# Altium PCB controlTP2.PcbDoc
Units mm, origin at the board's own origin, x right, y up, seen from the top; angles counter-clockwise.
Board outline 50 x 50.04 mm, 2 copper layers (Top Layer, Bottom Layer); 25 components, 18 nets, 69 pads, 0 vias.
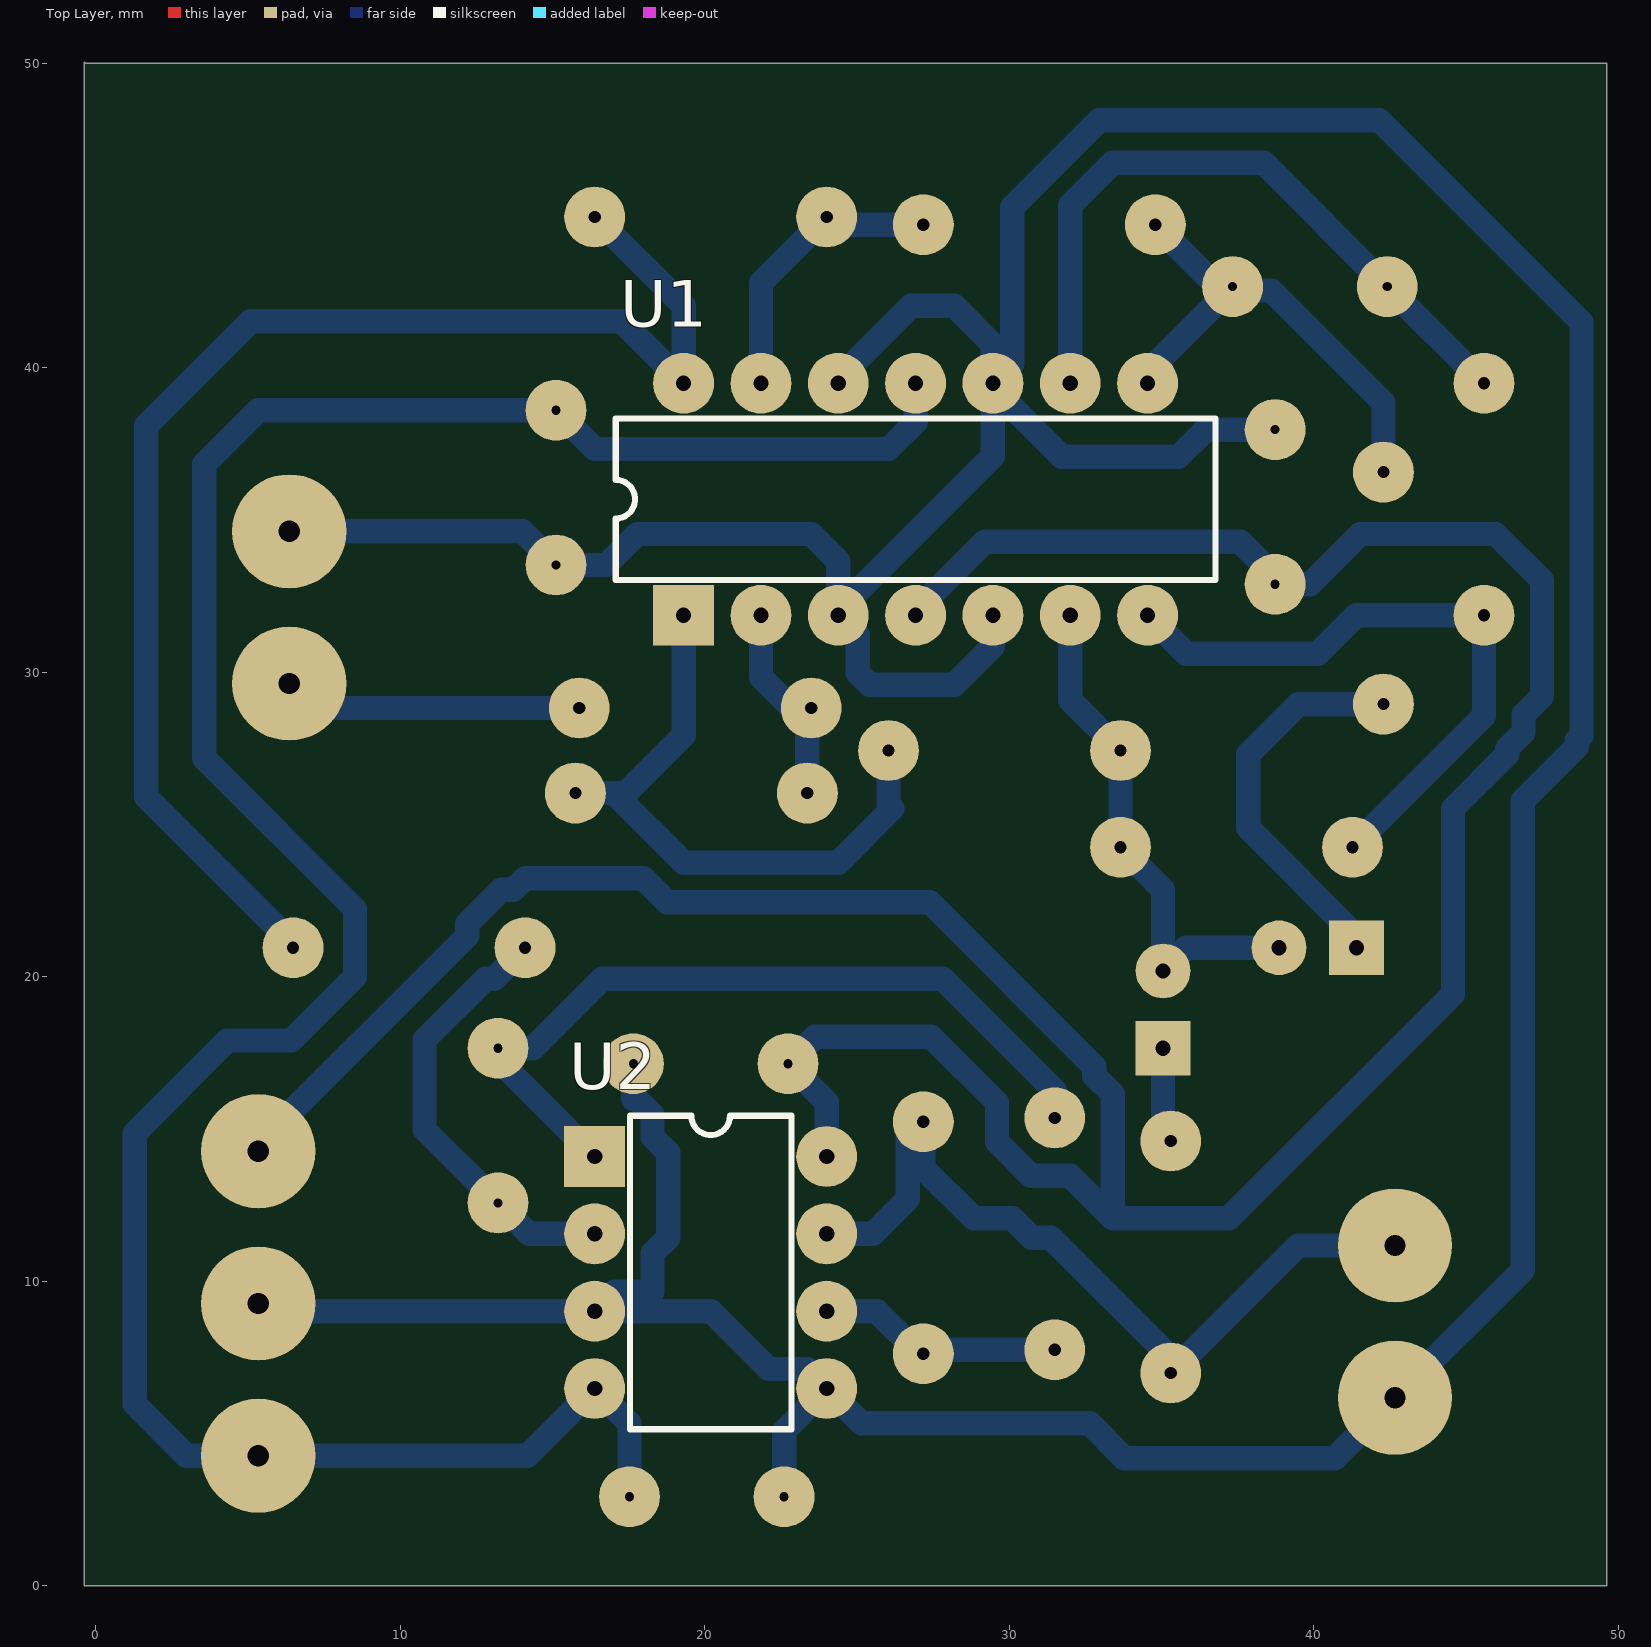
[diagram p0: Top Layer view]
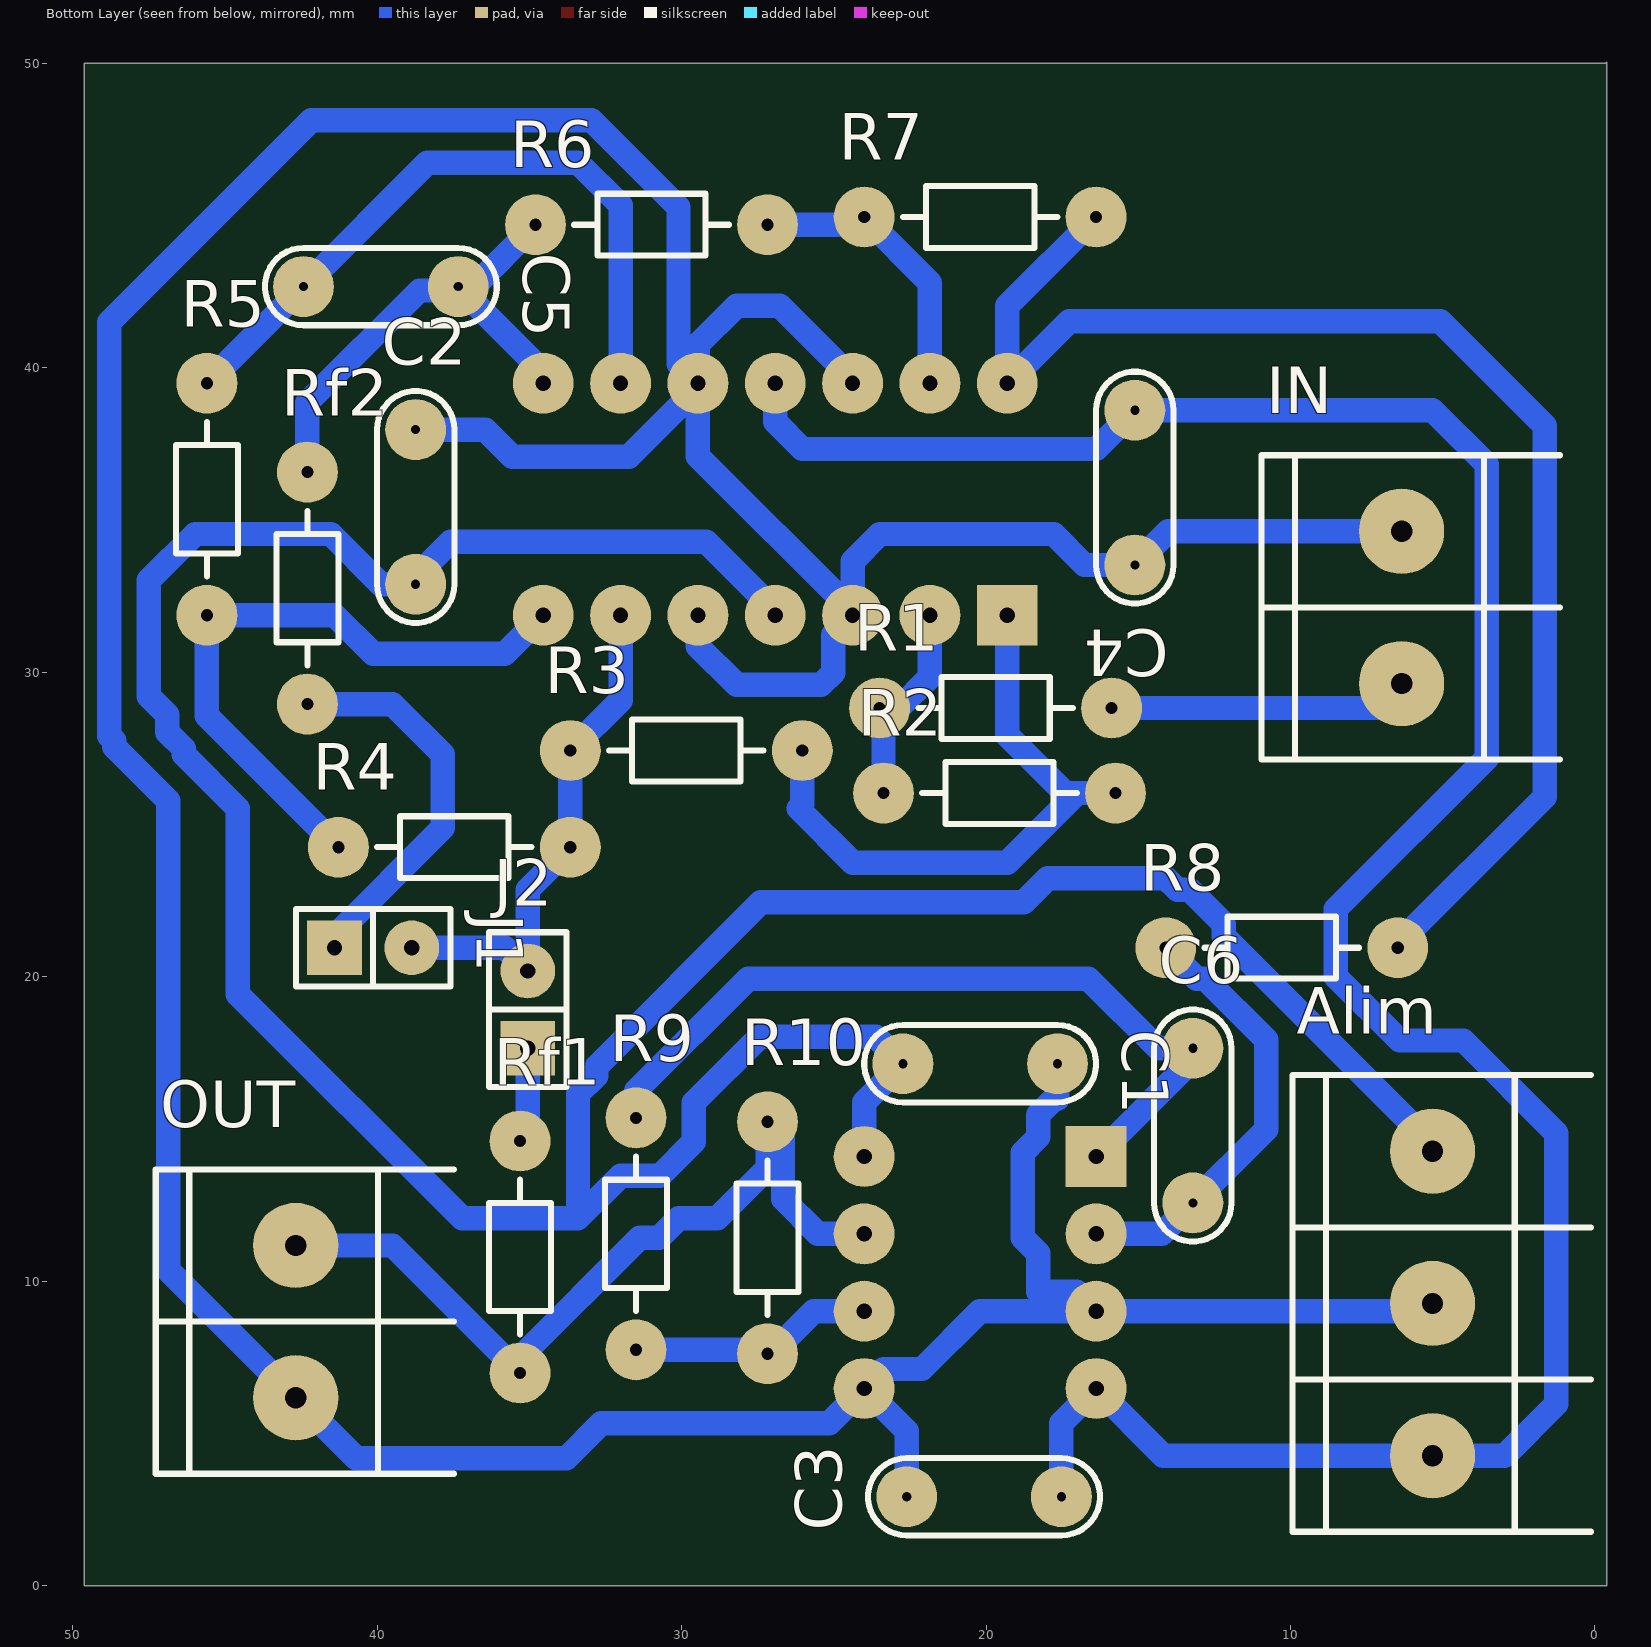
[diagram p1: Bottom Layer view, seen from below]
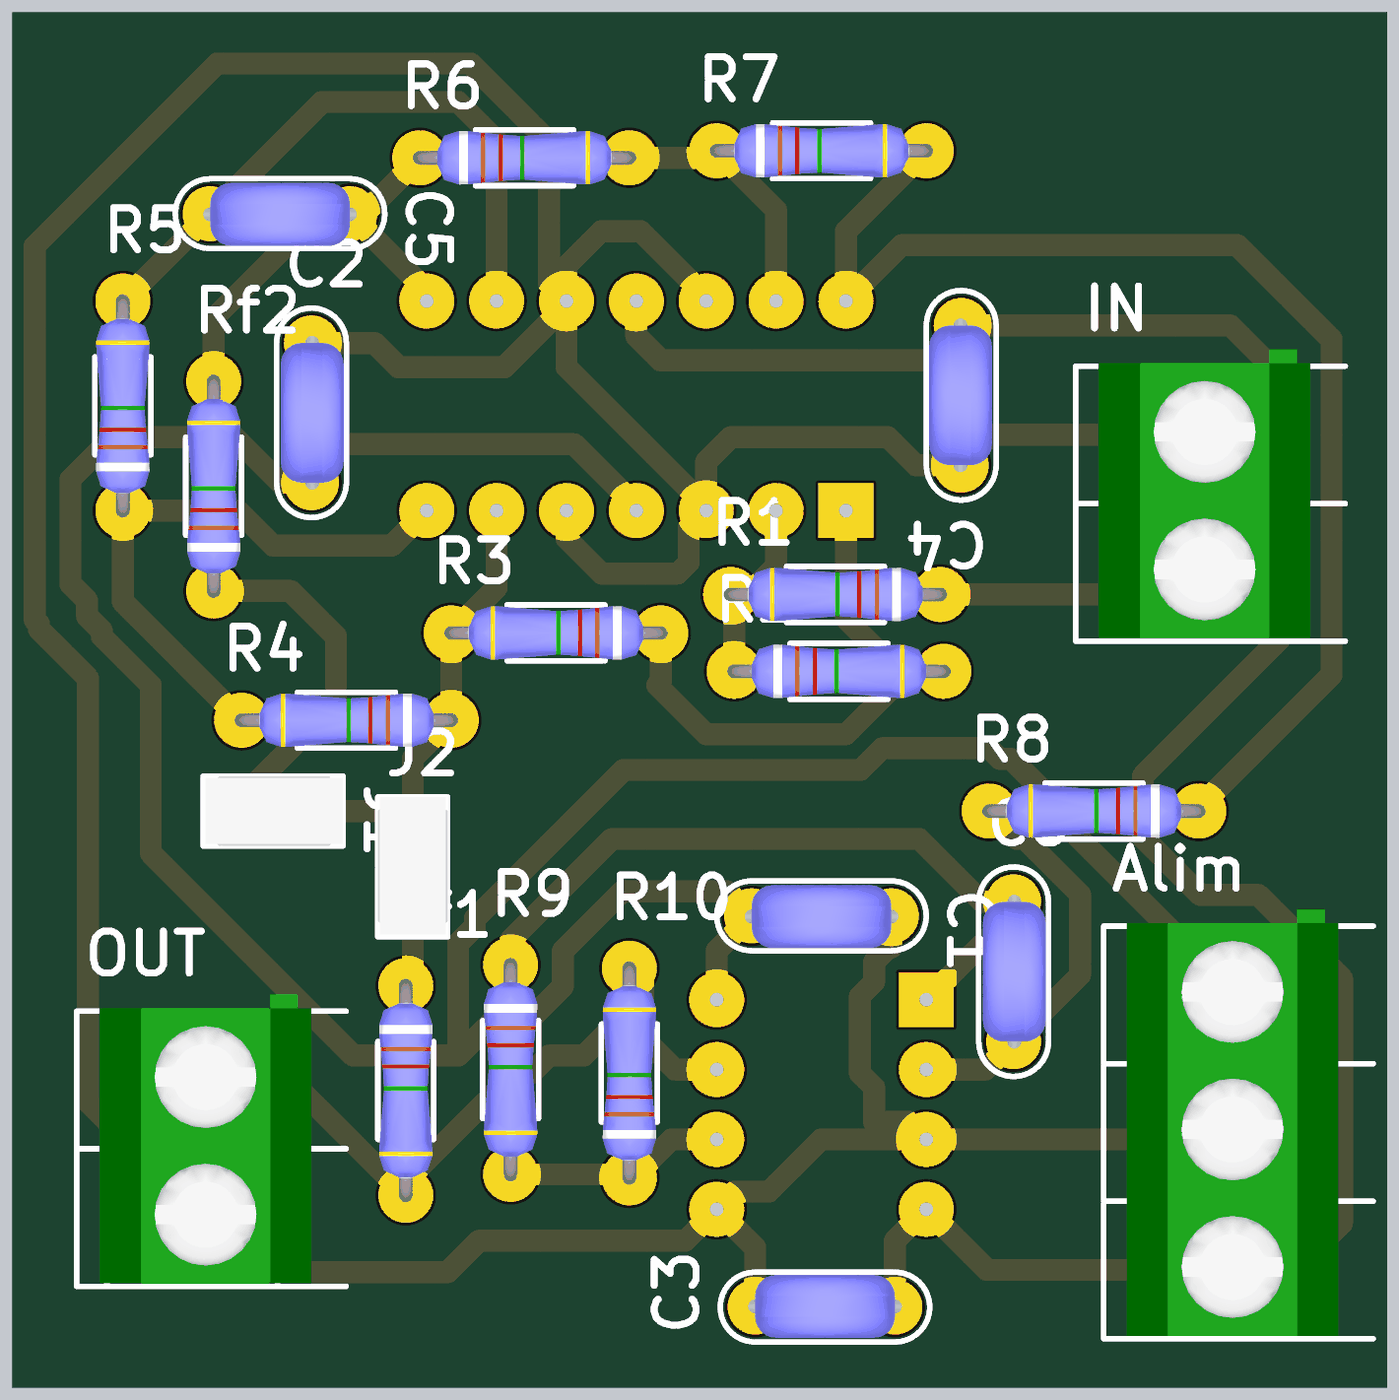
[diagram p2: 3D render of the assembled board from below, using the file's embedded part models]

## Layer stack, top to bottom
Top Solder: solder mask 0.0102, Solder Resist, Dk 3.5
Top Layer: signal copper 0.0356
Dielectric 1: dielectric 0.32, FR-4, Dk 4.8
Bottom Layer: signal copper 0.0356
Bottom Solder: solder mask 0.0102, Solder Resist, Dk 3.5

## Board outline
-0.381,50.038 -0.343,50 49.619,50 49.619,0 -0.381,0

## Design rules (kind name [scope] priority, off if disabled: settings)
Clearance [All] p1: gap=0.5 ignorepadtopadclearanceinfootprint=FALSE
PolygonConnect [All] p1: connectstyle=Relief reliefconductorwidth=0.254 reliefentries=4 polygonreliefangle="90 Angle" airgapwidth=0.254
RoutingVias [All] p1: holewidth=0.4 width=2 viastyle="Through Hole" minholewidth=0.3 minwidth=1.9 maxholewidth=0.5 maxwidth=2.2
SolderMaskExpansion [All] p1: expansion=0.102
Width [All] p1: maxlimit=0.9 minlimit=0.7 preferedwidth=0.8
30 further rules are at their usual default settings.

## Components (designator, comment, footprint, x,y, rotation, side; value= is the part's Value field where it differs from the comment)
Alim "BORNERA 3" BORNERA3 5.334,9.271 r180 bottom
C1 "100n" CAP200 20.193,17.145 r180 bottom
C2 "100n" CAP200 38.735,35.433 r90 bottom
C3 "100n" CAP200 20.066,2.921 r0 bottom
C4 "100n" CAP200 15.113,36.068 r270 bottom
C5 "1uF" CAP200 39.878,42.672 r180 bottom
C6 "1uF" CAP200 13.208,15.113 r90 bottom
IN "BORNERA" BORNERA2 6.35,32.131 r180 bottom
J1 "JUMPER" JUMPER2 40.132,20.955 r180 bottom
J2 "JUMPER" JUMPER2 35.052,18.923 r90 bottom
OUT "BORNERA 2" BORNERA2 42.672,8.676 r180 bottom
R1 "10k" RES300 15.875,28.829 r0 bottom
R2 "10k" RES300 23.368,26.035 r180 bottom
R3 "10k" RES300 26.035,27.432 r0 bottom
R4 "10k" RES300 33.655,24.257 r0 bottom
R5 "100k" RES300 45.593,31.877 r90 bottom
R6 "10k" RES300 34.798,44.704 r180 bottom
R7 "10k" RES300 24.003,44.958 r180 bottom
R8 "47k" RES300 6.477,20.955 r0 bottom
R9 "10k" RES300 31.496,15.367 r270 bottom
R10 "10k" RES300 27.178,7.62 r90 bottom
Rf1 "10k" RES300 35.306,14.605 r270 bottom
Rf2 "5k6" RES300 42.291,28.956 r90 bottom
U1 "TL084N" N014 26.924,35.687 r0 top
U2 "TL082JG" JG008 20.193,10.287 r270 top

## Footprints (in the part's own frame and the unit in brackets; to place one, negate y for a bottom-side part, rotate by r counter-clockwise, add the part's x,y. Pads: shape width x height; smd on the part's side, far side on the other; paste and mask are expansions set on the pad)
BORNERA2 [mm] "Bornera con Tornillos 5mm separación"
  round 2.8 / inner round 3.75 / far side round 3.75 hole 0.7: 1(0,2.5) 2(0,-2.5)
  silkscreen extent -4.6,-5 5.2,5, body extent -3.76,-4.89 3.94,5.61, height 10
BORNERA3 [mm] "Bornera con Tornillos 5mm separación"
  round 2.8 / inner round 3.75 / far side round 3.75 hole 0.7: 1(0,5) 2(0,0) 3(0,-5)
  silkscreen extent -4.6,-7.5 5.2,7.5, body extent -3.76,-7.39 3.94,8.11, height 10.05
CAP200 [mm]
  round 2 hole 0.3: 1(-2.54,0) 2(2.54,0)
  silkscreen extent -3.81,-1.27 3.81,1.27, body extent -2.79,-1.17 2.79,1.12, height 6.24
JG008 [mm] "DIP; 8 Leads; Row Spacing 7.62 mm; Pitch 2.54 mm"
  rect 2x2 hole 0.5: 1(-3.81,-3.81)
  round 2 hole 0.5: 2(-1.27,-3.81) 3(1.27,-3.81) 4(3.81,-3.81) 5(3.81,3.81) 6(1.27,3.81) 7(-1.27,3.81) 8(-3.81,3.81)
  silkscreen extent -5.15,-2.65 5.15,2.65
JUMPER2 [mm]
  rect 1.8x1.8 hole 0.5: 1(-1.27,0)
  round 1.8 hole 0.5: 2(1.27,0)
  silkscreen extent -2.54,-1.27 2.54,1.27, body extent -2.46,-1.27 2.54,1.27, height 9.5
N014 [mm] "DIP; 14 Leads; Row Spacing 7.62 mm; Pitch 2.54 mm"
  rect 2x2 hole 0.5: 1(-7.62,-3.81)
  round 2 hole 0.5: 2(-5.08,-3.81) 3(-2.54,-3.81) 4(0,-3.81) 5(2.54,-3.81) 6(5.08,-3.81) 7(7.62,-3.81) 8(7.62,3.81) 9(5.08,3.81) 10(2.54,3.81) 11(0,3.81) 12(-2.54,3.81) 13(-5.08,3.81) 14(-7.62,3.81)
  silkscreen extent -9.85,-2.65 9.85,2.65
RES300 [mm]
  round 2 hole 0.4: 1(0,0) 2(7.62,0)
  silkscreen extent 1.27,-1.02 6.35,1.02, body extent -0.25,-0.97 7.87,0.97, height 2.01

## Part data
C1 C2 C3 C4 C5 C6: library part CAP
IN: library part "BORNERA 2"
R1 R2 R3 R4 R5 R6 R7 R8 R9 R10 Rf1 Rf2: library part RES
U1 U2: "JFET-Input Operational Amplifier", ComponentLink1Description="Manufacturer Link", ComponentLink1URL=http://www.ti.com/, ComponentLink2Description=Datasheet, DatasheetVersion=Feb-1999, LatestRevisionDate=04-Mar-2005, LatestRevisionNote="Stylized 3D Model Added.", Published=16-Jan-2001, Publisher="Altium Limited"
  U1: ComponentLink2URL=http://www-s.ti.com/sc/ds/tl084.pdf, PackageDescription="DIP; 14 Leads; Row Spacing 7.62 mm; Pitch 2.54 mm", PackageReference=N014, PackageVersion=Oct-1995
  U2: ComponentLink2URL=http://www-s.ti.com/sc/ds/tl082.pdf, PackageDescription="DIP; 8 Leads; Row Spacing 7.62 mm; Pitch 2.54 mm", PackageReference=JG008, PackageVersion=Jan-1995

## Nets (pads, with @x,y where several pads share a name; then routed paths per layer and width w, separated by ;. In a path a pad name is that pad's centre, name@x,y a point inside that pad or via, vN(x,y) a via of type N, cw(c..) or ccw(c..) an arc to the next point about the centre after c; other vN are vias at no path point)
+VCC: Alim.1 C1.1 C2.1 U1.4 U2.8 | length 109.9
  Bottom Layer w0.8: Alim.1 5.334,14.478 12.197,21.341 12.197,21.742 13.31,22.855 13.711,22.855 14.097,23.241 17.974,23.241 18.766,22.449 27.395,22.449 32.796,17.048 32.796,16.754 33.401,16.149 33.401,12.065 ; U2.8 24.003,15.875 C1.1 23.622,18.034 27.432,18.034 29.596,15.87 29.596,14.58 30.709,13.467 31.999,13.467 33.401,12.065 ; U1.4 26.924,32.024 29.19,34.29 37.592,34.29 38.735,33.147 C2.1 39.878,32.893 41.529,34.544 45.974,34.544 47.498,33.02 47.498,29.21 46.893,28.605 46.893,28.037 46.355,27.499 46.355,27.305 44.577,25.527 44.577,19.431 37.211,12.065 33.401,12.065
-VCC: Alim.3 C3.1 C4.1 U1.11 U2.4 | length 84.2
  Bottom Layer w0.8: C3.1 17.526,5.334 U2.4 14.177,4.271 Alim.3 2.968,4.271 1.27,5.969 1.27,14.859 4.318,17.907 6.417,17.907 8.509,19.999 8.509,22.225 3.556,27.178 3.556,36.83 5.334,38.608 C4.1 16.383,37.338 26.035,37.338 26.924,38.227 U1.11
GND: Alim.2 C1.2 C2.2 C3.2 C4.2 IN.1 OUT.2 U1.3 U1.5 U1.10 U1.12 U2.3 U2.5 | length 178.9
  Bottom Layer w0.8: Alim.2 5.588,9.017 U2.3 ; IN.1 14.01,34.631 C4.2 16.764,33.528 17.78,34.544 23.495,34.544 24.384,33.655 U1.3@24.384,32.024 ; C1.2 17.653,15.997 17.756,15.997 18.283,15.47 18.283,14.737 18.796,14.224 18.796,11.43 18.283,10.917 18.283,9.657 17.023,9.657 U2.3 ; C3.2 22.606,5.08 U2.5 ; U1.12 24.384,39.644 26.777,42.037 28.194,42.037 29.464,40.767 U1.10 ; U1.5 29.464,30.861 28.194,29.591 25.42,29.591 25.024,29.987 25.024,31.237 U1.3 U1.3@24.384,32.024 ; C2.2 36.449,37.973 35.56,37.084 31.73,37.084 U1.10@29.464,39.35 ; U2.3 20.203,9.017 22.103,7.117 23.363,7.117 U2.5 ; U2.5 25.146,5.334 32.639,5.334 33.782,4.191 40.687,4.191 OUT.2 46.863,10.367 46.863,25.781 48.641,27.559 48.641,27.753 48.798,27.91 48.798,41.499 42.164,48.133 32.96,48.133 30.104,45.277 30.104,40.137 U1.10 ; U1.3@24.384,32.024 29.464,37.104 U1.10@29.464,39.35 ; U1.10@29.464,39.35 U1.10
NetC5_1: C5.1 R5.2 U1.9 | length 23
  Bottom Layer w0.8: U1.9 32.004,45.339 33.401,46.736 38.354,46.736 C5.1 R5.2
NetC5_2: C5.2 R6.1 Rf2.2 U1.8 | length 16.5
  Bottom Layer w0.8: U1.8 34.544,39.878 C5.2 ; R6.1 36.83,42.672 C5.2 ; Rf2.2 42.291,38.862 38.608,42.545 37.465,42.545 C5.2
NetC6_1: C6.1 R8.2 U2.2 | length 14.5
  Bottom Layer w0.8: R8.2 13.081,19.939 12.807,19.939 10.795,17.927 10.795,14.986 C6.1 14.224,11.557 U2.2
NetC6_2: C6.2 R9.1 U2.1 | length 26.5
  Bottom Layer w0.8: U2.1 13.208,17.272 C6.2 14.351,17.653 16.637,19.939 27.813,19.939 31.496,16.256 R9.1
NetIN_2: IN.2 R1.1 | length 9.9
  Bottom Layer w0.8: IN.2 7.152,28.829 R1.1
NetJ1_1: J1.1 Rf2.1 | length 13
  Bottom Layer w0.8: J1.1 41.402,21.336 37.846,24.892 37.846,27.305 39.497,28.956 Rf2.1
NetJ1_2: J1.2 J2.2 R3.2 R4.1 U1.6 | length 17.1
  Bottom Layer w0.8: U1.6 32.004,29.083 R3.2 R4.1 35.052,22.86 J2.2 35.814,20.955 J1.2
NetJ2_1: J2.1 Rf1.1 | length 3.2
  Bottom Layer w0.8: J2.1 35.052,14.859 Rf1.1
NetOUT_1: OUT.1 R10.2 Rf1.2 U2.7 | length 27.7
  Bottom Layer w0.8: U2.7 25.527,11.557 26.67,12.7 26.67,14.732 R10.2 27.178,13.716 28.829,12.065 30.099,12.065 30.734,11.43 31.369,11.43 35.306,7.493 Rf1.2 39.497,11.176 OUT.1
NetR1_2: R1.2 R2.1 U1.2 | length 7
  Bottom Layer w0.8: U1.2 21.844,29.845 22.86,28.829 R1.2 23.368,28.702 R2.1
NetR2_2: R2.2 R3.1 U1.1 | length 21.1
  Bottom Layer w0.8: R2.2 17.018,26.035 ; U1.1 19.304,27.94 17.399,26.035 17.018,26.035 ; R3.1 26.035,25.654 26.162,25.527 24.384,23.749 19.304,23.749 17.018,26.035
NetR4_2: R4.2 R5.1 U1.7 | length 21.8
  Bottom Layer w0.8: U1.7@34.544,31.623 U1.7 35.814,30.607 40.132,30.607 41.402,31.877 R5.1 45.593,28.575 R4.2
NetR6_2: R6.2 R7.1 U1.13 | length 9.6
  Bottom Layer w0.8: U1.13 21.844,42.799 R7.1 24.257,44.704 R6.2
NetR7_2: R7.2 R8.1 U1.14 | length 45.7
  Bottom Layer w0.8: R8.1 6.477,21.082 1.651,25.908 1.651,38.1 5.08,41.529 17.272,41.529 U1.14 19.304,42.037 R7.2
NetR9_2: R9.2 R10.1 U2.6 | length 8.1
  Bottom Layer w0.8: U2.6 25.654,9.017 27.051,7.62 R10.1 27.305,7.747 R9.2